# Altium PCB AFE_TESTBRD.PcbDoc
Units mil, origin at the board's own origin, x right, y up, seen from the top; angles counter-clockwise.
Board outline 3937.01 x 1968.5 mil, 2 copper layers (Top Layer, Bottom Layer); 60 components, 25 nets, 146 pads, 22 vias.
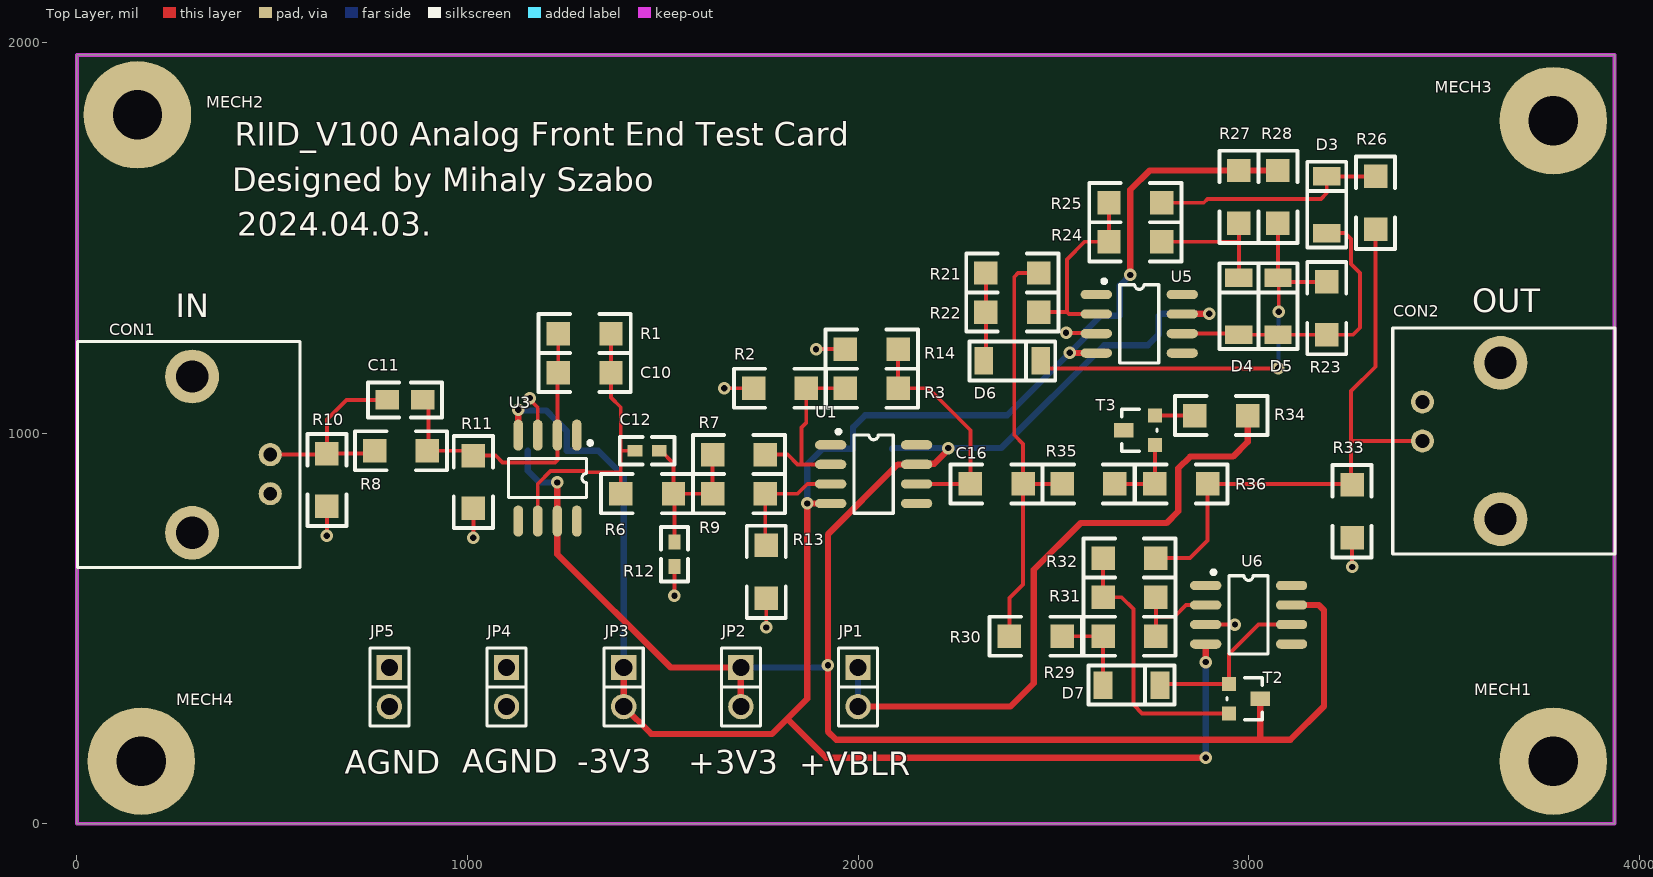
[diagram p0: Top Layer view]
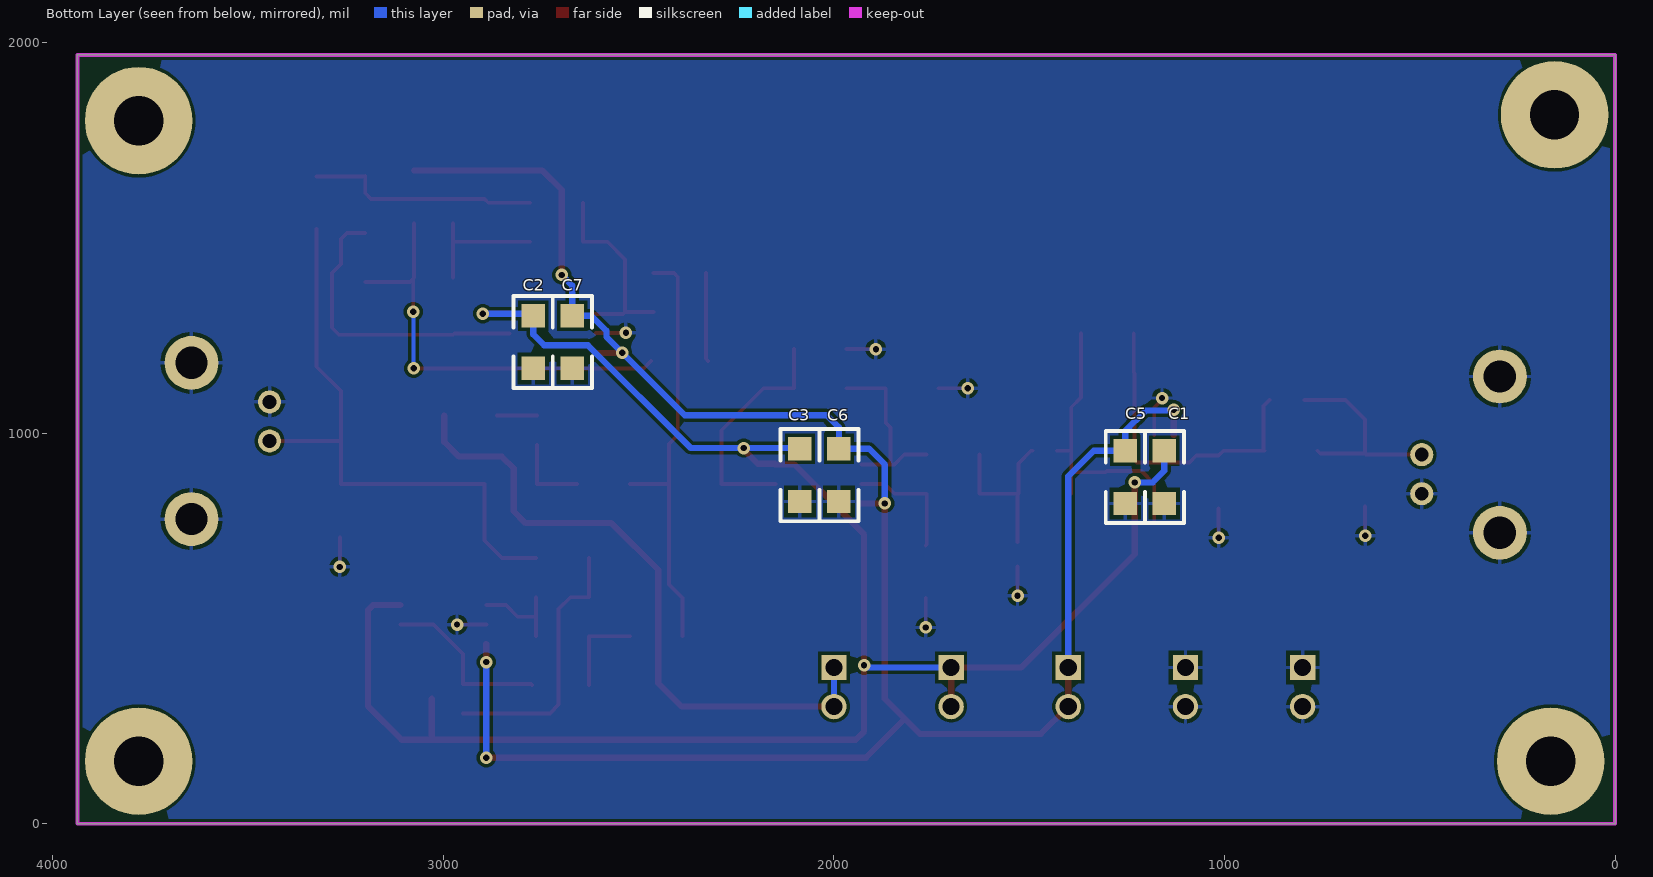
[diagram p1: Bottom Layer view, seen from below]
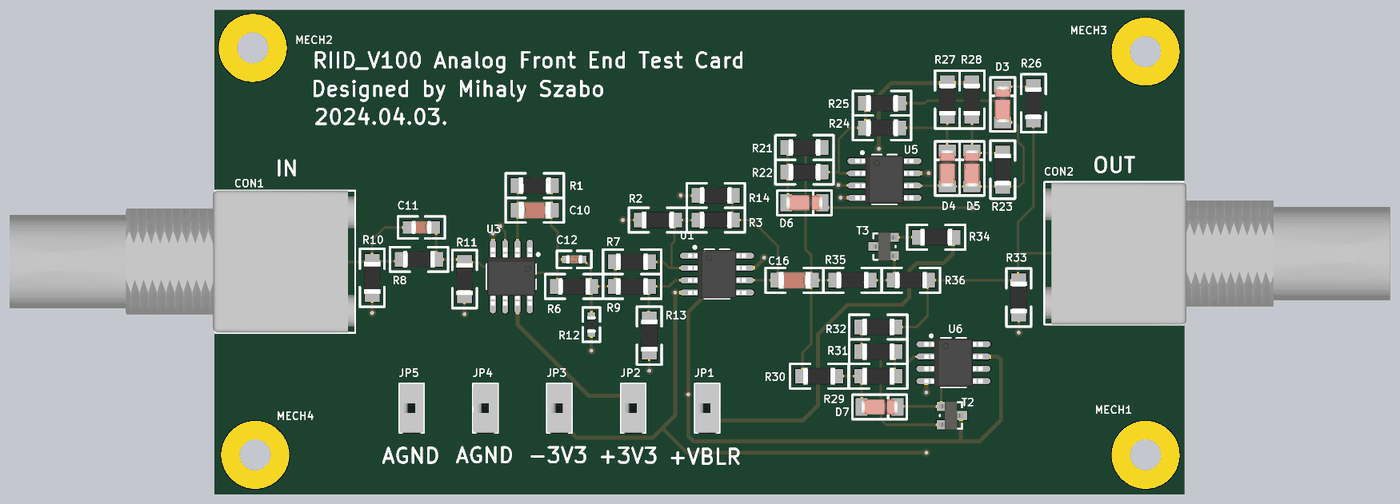
[diagram p2: 3D render of the assembled board from above, using the file's embedded part models]
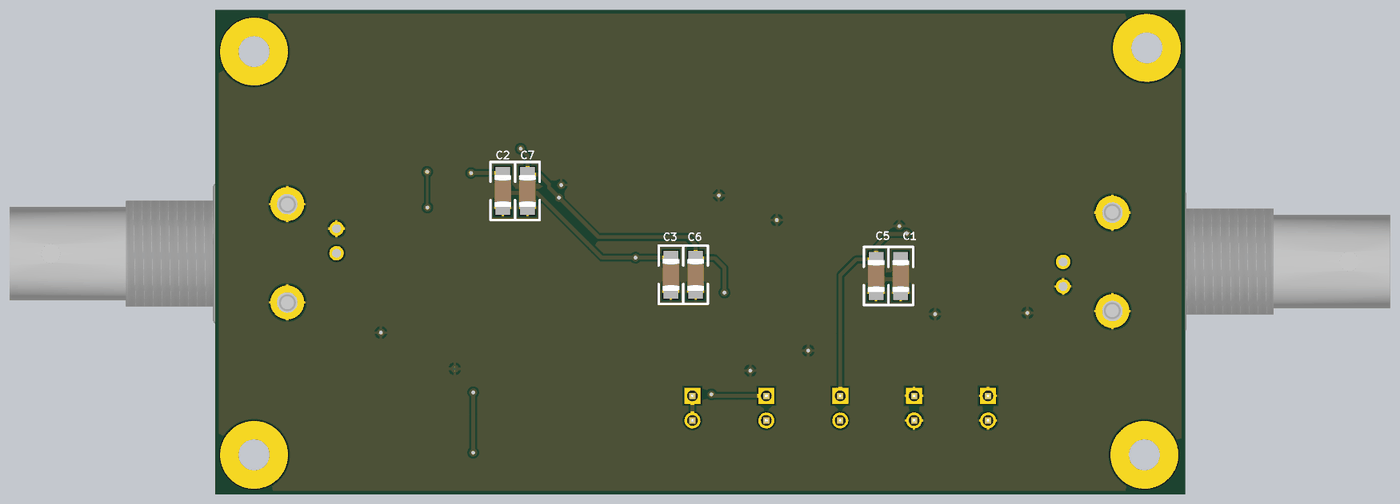
[diagram p3: 3D render of the assembled board from below, using the file's embedded part models]

## Layer stack, top to bottom
Top Solder: solder mask 0.4, Solder Resist, Dk 3.5
Top Layer: signal copper 1.4
Dielectric 1: dielectric 12.6, FR-4, Dk 4.8
Bottom Layer: signal copper 1.4
Bottom Solder: solder mask 0.4, Solder Resist, Dk 3.5

## Board outline
0,0 3937.01,0 3937.01,1968.5 0,1968.5

## Design rules (kind name [scope] priority, off if disabled: settings)
Clearance [All] p1: gap=8 ignorepadtopadclearanceinfootprint=FALSE
PolygonConnect [All] p1: connectstyle=Relief reliefconductorwidth=10 reliefentries=4 polygonreliefangle="90 Angle" airgapwidth=10
RoutingVias [All] p1: holewidth=16 width=32 viastyle="Through Hole" minholewidth=16 minwidth=32 maxholewidth=16 maxwidth=32
SilkToSilkClearance [All] p1 off: silktosilkclearance=10
SilkToSolderMaskClearance [IsPad] p1 off: minsilkscreentomaskgap=10 clearancetoexposedcopper=TRUE
SolderMaskExpansion [All] p1: expansion=4 istentingtop=FALSE
Width [All] p1: maxlimit=40 minlimit=10 preferedwidth=16 minimp=50.000000 maximp=50.000000 favimp=50.000000
28 further rules are at their usual default settings.

## Classes and differential pairs
component class U_BLR: C16 D3 D4 D5 D6 D7 R21 R22 R23 R24 R25 R26 R27 R28 R29 R30 R31 R32 R33 R34 R35 R36 T2 T3 U5 U6
component class AFE: C1 C2 C3 C5 C6 C7 C10 C11 C12 CON1 CON2 JP1 JP2 JP3 JP4 JP5 MECH1 MECH2 MECH3 MECH4 R1 R2 R3 R6 R7 R8 R9 R10 R11 R12 R13 R14 U1 U3

## Components (designator, comment, footprint, x,y, rotation, side; value= is the part's Value field where it differs from the comment)
C1 "100nF / 50V" 1206_C 1159.13,892.5 r270 bottom
C2 "100nF / 50V" 1206_C 2774.95,1238.32 r270 bottom
C3 "100nF / 50V" 1206_C 2092.2,897.5 r270 bottom
C5 "100nF / 50V" 1206_C 1249.13,882.5 r90 bottom
C6 "100nF / 50V" 1206_C 1982.2,887.5 r90 bottom
C7 "100nF / 50V" 1206_C 2664.95,1228.32 r90 bottom
C10 "470pF / 50V" 1206_C 1305,1160 r180 top
C11 "1nF / 50V" 0805_C 840,1085 r0 top
C12 "1nF / 50V" 0603_C 1460,955 r0 top
C16 "1uF / 50V" 1206_C 2350,865 r0 top
CON1 "BNC 90DEG" CON_BNC_TE_ZDC 495,945 r90 top
CON2 "BNC 90DEG" CON_BNC_TE_ZDC 3445,980 r270 top
D3 "BAS85" SOD80 3200,1590 r270 top
D4 "BAS85" SOD80 2975,1330 r270 top
D5 "BAS85" SOD80 3075,1330 r270 top
D6 "BAS85" SOD80 2400,1185 r180 top
D7 "BAS85" SOD80 2705,355 r180 top
JP1 "JUMPER2 2.54MM" JUMPER_5 2000,350 r270 top
JP2 "JUMPER2 2.54MM" JUMPER_5 1700,350 r270 top
JP3 "JUMPER2 2.54MM" JUMPER_5 1400,350 r270 top
JP4 "JUMPER2 2.54MM" JUMPER_5 1100,350 r270 top
JP5 "JUMPER2 2.54MM" JUMPER_5 800,350 r270 top
MECH1 "MH M3" "PAD_M3 x 7" 3780,160 r0 top
MECH2 "MH M3" "PAD_M3 x 7" 155,1815 r0 top
MECH3 "MH M3" "PAD_M3 x 7" 3780,1800 r0 top
MECH4 "MH M3" "PAD_M3 x 7" 165,160 r0 top
R1 "2.2k" 1206 1300,1255 r180 top
R2 "1k" 1206 1800,1115 r0 top
R3 "4.7k" 1206 2035,1115 r0 top
R6 "1k" 1206 1460,845 r0 top
R7 "0R" 1206 1695,945 r0 top
R8 "0R" 1206 830,955 r0 top
R9 "0R" 1206 1695,845 r0 top
R10 "0R" 1206 640,880 r90 top
R11 "0R" 1206 1015,875 r90 top
R12 "220R" 0603 1530,690 r90 top
R13 "0R" 1206 1765,645 r90 top
R14 "1k" 1206 2035,1215 r0 top
R21 "0R" 1206 2395,1410 r180 top
R22 "1k" 1206 2395,1310 r0 top
R23 "1k" 1206 3200,1320 r270 top
R24 "10k" 1206 2710,1490 r0 top
R25 "1k" 1206 2710,1590 r0 top
R26 "0R" 1206 3325,1590 r270 top
R27 "1k" 1206 2975,1605 r270 top
R28 "1k" 1206 3075,1605 r270 top
R29 "1k" 1206 2695,480 r0 top
R30 "0R" 1206 2455,480 r0 top
R31 "1k" 1206 2695,580 r180 top
R32 "0R" 1206 2695,680 r0 top
R33 "1k" 1206 3265,800 r90 top
R34 "1k" 1206 2930,1045 r180 top
R35 "0R" 1206 2590,870 r0 top
R36 "0R" 1206 2827.5,870 r0 top
T2 "BC848B" SOT-23 2990,320 r270 top
T3 "BC856B" SOT-23 2720,1007.4 r90 top
U1 "LT1806CS8#PBF" SO-8 2040,895 r0 top
U3 "OPA656" SO-8 1205,885 r270 top
U5 "LT1806CS8#PBF" SO-8 2720,1280 r0 top
U6 "LT1806CS8#PBF" SO-8 3000,535 r0 top

## Footprints (in the part's own frame and the unit in brackets; to place one, negate y for a bottom-side part, rotate by r counter-clockwise, add the part's x,y. Pads: shape width x height; smd on the part's side, far side on the other; paste and mask are expansions set on the pad)
0603 [mil]
  rect 38x30 smd: 1(-31,0) 2(31,0)
  silkscreen extent -70,-35 70,35, body extent -33,-18 33,18, height 22
0603_C [mil]
  rect 38x30 smd: 1(-31,0) 2(31,0)
  silkscreen extent -70,-35 70,35, body extent -33,-18 33,18, height 35
0805_C [mil]
  rect 60x50 smd: 1(-45,0) 2(45,0)
  silkscreen extent -95,-45 95,45, body extent -41,-27 41,27, height 30
1206 [mil]
  rect 60x60 smd: 1(-67.5,0) 2(67.5,0)
  silkscreen extent -118,-50 118,50, body extent -65,-33 65,33, height 26
1206_C [mil]
  rect 60x60 smd: 1(-62.5,5) 2(72.5,5)
  silkscreen extent -113,-45 123,55, body extent -61,-29 71,39, height 39
CON_BNC_TE_ZDC [mm]
  round 1.5 hole 0.9: 1(0,0) 2(-2.54,0)
  round 3.5 hole 2.1: 3(5.08,5.08) 4(-5.08,5.08)
  silkscreen extent -7.35,-1.93 7.35,12.53, body extent -7.32,-1.85 7.38,33.72, height 15.2
JUMPER_5 [mil]
  rect 65x65 hole 44: 1(-50,0)
  round 65 hole 44: 2(50,0)
  silkscreen extent -100,-50 100,50, body extent -99,-49 104,49, height 488
"PAD_M3 x 7" [mm]
  round 7 hole 3.2: M3(0,0)
SO-8 [mil]
  oval 80x24 smd: 1(-110,75) 2(-110,25) 3(-110,-25) 4(-110,-75) 5(110,-75) 6(110,-25) 7(110,25) 8(110,75)
  silkscreen extent -95,-100 50,114, body extent -118,-98 118,98, height 69
SOD80 [mil]
  rect 48x70 smd: A(78,0) K(-68,0)
  silkscreen extent -105,-50 115,50, body extent -68,-32 78,32, height 63
SOT-23 [mil]
  rect 36x36 smd: 1(-37.4,-40) 2(37.4,-40)
  rect 36x50 smd: 3(0,40)
  silkscreen extent -54,-45 54,45, body extent -57,-49 57,48, height 40

## Part data
C1 C2 C3 C5 C6 C7: library part 163, "100nF 50V X7R", Part Number=SMD1206-100nF-50V, Azonosító=163, Category=Passives, Subcategory=PASS_Capacitor, Supplier 1=HESTORE, Supplier 1 order number=100.002.89
C10: library part 159, "470pF 50V C0G", Part Number=SMD1206-470pF-50V, Azonosító=159, Category=Passives, Subcategory=PASS_Capacitor, Supplier 1=HESTORE, Supplier 1 order number=100.201.00
C11: library part 144, "1nF 50V X7R", Part Number=SMD0805-1nF-50V, Azonosító=144, Category=Passives, Subcategory=PASS_Capacitor, Supplier 1=HESTORE, Supplier 1 order number=100.200.70
C12: library part 121, "1 nF 50V X7R", Part Number=SMD0603-1nF-50V, Azonosító=121, Category=Passives, Subcategory=PASS_Capacitor, Supplier 1=HESTORE, Supplier 1 order number=100.277.92
C16: library part 166, "1uF 50V X7R", Part Number=SMD1206-1uF-50V, Azonosító=166, Category=Passives, Subcategory=PASS_Capacitor, Supplier 1=HESTORE, Supplier 1 order number=100.275.08
CON1 CON2: library part 322, "031-5431", Azonosító=322, Category=Connectors, Help URL=https://hu.mouser.com/datasheet/2/18/1/C031_5431-2452407.pdf, Part Number="BNC 90DEG", Subcategory=CONN_Board-to-Wire, Supplier 1=MOUSER, Supplier 1 order number=523-31-5431
D3 D4 D5 D6 D7: library part 371, "Small Signal Schottky Diode, Single, 30 V, 200 mA,  125 °C", Azonosító=371, Category=Semiconductors, Help URL=https://4donline.ihs.com/images/VipMasterIC/IC/NEXP/NEXP-S-A0002881467/NEXP-S-A0002882622-1.pdf?hkey=6D3A4C79FDBF58556ACFDE234799DDF0, Part Number=BAS85, Subcategory=SEMI_Schottky, Supplier 1=HESTORE, Supplier 1 order number=100.222.42, Supplier 2=FARNELL, Supplier 2 order number=1097282
JP1 JP2 JP3 JP4 JP5: library part 246, Azonosító=246, Category=Connectors, Part Number="JUMPER2 2.54MM", Subcategory=CONN_Other, Supplier 1=FARNELL, Supplier 1 order number=2356153
MECH1 MECH2 MECH3 MECH4: library part 268, "3.2/7mm Mounting_Hole_M3", Part Number=Mounting_Hole_M3, Azonosító=268, Category=Electro-mechanicals, Subcategory=ELME_Other
R1: library part 88, "2.2k 1206 0.25W 5%", Part Number="SMD1206-2.2k 5%", Azonosító=88, Category=Passives, Subcategory=PASS_Resistor, Supplier 1=HESTORE, Supplier 1 order number=100.002.94
R2 R6 R14 R22 R23 R25 R27 R28 R29 R31 R33 R34: library part 87, "1k 1206 0.25W 5%", Part Number="SMD1206-1k 5%", Azonosító=87, Category=Passives, Subcategory=PASS_Resistor, Supplier 1=HESTORE, Supplier 1 order number=100.002.56
R3: library part 90, "4.7k 1206 0.25W 5%", Part Number="SMD1206-4.7k 5%", Azonosító=90, Category=Passives, Subcategory=PASS_Resistor, Supplier 1=HESTORE, Supplier 1 order number=100.002.99
R7 R8 R9 R10 R11 R13 R21 R26 R30 R32 R35 R36: library part 74, "0R 1206 0.25W 5%", Part Number="SMD1206-0R 5%", Azonosító=74, Category=Passives, Subcategory=PASS_Resistor, Supplier 1=HESTORE, Supplier 1 order number=100.013.21
R12: library part 14, "220R 0603 0.1W 1%", Part Number=SMD0603-220R-1%, Azonosító=14, Category=Passives, Subcategory=PASS_Resistor, Supplier 1=HESTORE, Supplier 1 order number=100.368.36
R24: library part 92, "10k 1206 0.25W 5%", Part Number="SMD1206-10k 5%", Azonosító=92, Category=Passives, Subcategory=PASS_Resistor, Supplier 1=HESTORE, Supplier 1 order number=100.002.97
T2: library part 309, "Bipolar (BJT) Single Transistor, NPN, 30 V, 100 mA, 300 mW, SOT-23, Surface Mount", Azonosító=309, Category=Semiconductors, Help URL=https://hu.mouser.com/datasheet/2/849/bc846-3324195.pdf, Part Number=BC848B, Subcategory=SEMI_Transistor, Supplier 1=HESTORE, Supplier 1 order number=100.209.08, Supplier 2=MOUSER, Supplier 2 order number=637-BC848B
T3: library part 312, "BC856B Bipolar (BJT) Single Transistor, PNP, 65 V, 100 mA, 250 mW, SOT-23, Surface Mount", Azonosító=312, Category=Semiconductors, Help URL=https://hu.mouser.com/datasheet/2/849/bc856-3324318.pdf, Part Number=BC856B, Subcategory=SEMI_Transistor, Supplier 1=HESTORE, Supplier 1 order number=100.001.06, Supplier 2=MOUSER, Supplier 2 order number=637-BC856B
U1 U5 U6: library part 353, "Single Channel, High Speed, Low Noise Precision Operational Amplifier, 325 MHz Typical GBW, 125 V/us Typical SR, 2.5 to 12.6 V, 8-Pin SOIC", Linear Technology Part Number=LT1806, Manufacturer="Linear Technology", Azonosító=353, Category="Integrated Circuits", Channels (#)=1, ComponentLink1Description="Manufacturer URL", ComponentLink1URL=http://www.linear.com/, ComponentLink2Description=Datasheet, ComponentLink2URL=http://cds.linear.com/docs/en/datasheet/18067fc.pdf, ComponentLink3Description="Package Specification", ComponentLink3URL=http://cds.linear.com/docs/en/packaging/05081610_G_SO8.pdf, DatasheetVersion="Rev. C", GBW (MHz) Typical=325, Help URL=https://hu.mouser.com/datasheet/2/609/18067fc-3124195.pdf, Is (mA) Typical=9, Mounting Technology="Surface Mount", PackageDescription="8-Pin Plastic Small Outline, Body 4.9 x 3.9 mm, Pitch 1.27 mm", PackageReference=LT-S8-8, PackageVersion="Rev G", Part Number=LT1806CS8#PBF, PartNumber=LT1806CS8#PBF, RevisionNote="URLs updated", RoHS=Pb-Free, SR (V/us) Typical=125, Subcategory=IC_Analog, Supplier 1=MOUSER, Supplier 1 order number=584-LT1806CS8#PBF, Type=VFB, Vos (mV) Guaranteed=0.55, Vos (mV) Typical=0.1, Vs Max (V)=12.6, Vs Min (V)=2.5
U3: library part 357, "Wideband, Unity Gain Stable FET-Input Operational Amplifier, 10 to 12 V, -40 to 85 degC, 8-pin SOIC", Manufacturer="Texas Instruments", PartNumber=OPA656U, 2nd Harmonic(dBc)=74, 3rd Harmonic(dBc)=100, @ MHz=5, Acl, min stable gain(V/V)=1, Azonosító=357, BW @ Acl(MHz)=500, Category="Integrated Circuits", Code_JEDEC=MS-012, ComponentLink1Description="Manufacturer URL", ComponentLink1URL=http://www.ti.com/, ComponentLink2Description=Datasheet, ComponentLink2URL=http://www.ti.com/general/docs/lit/getliterature.tsp?genericPartNumber=OPA656&fileType=pdf, ComponentLink3Description="Package Specification", ComponentLink3URL=http://www.ti.com/litv/pdf/msoi002j, DatasheetVersion=SBOS196G, Diff Gain(%)=0.02, Diff Phase(deg)=0.05, Eco-Plan="Green (RoHS & no Sb/Br)", Help URL=https://www.ti.com/lit/ds/symlink/opa656.pdf?HQS=dis-mous-null-mousermode-dsf-pf-null-wwe&ts=1703783263659&ref_url=https%253A%252F%252Fhu.mouser.com%252F, Iib(Max)(nA)=0.02, Io(Typ)(mA)=70, Iq per channel(Max)(mA)=16, Mounting Technology="Surface Mount", Number of Channels=1, PackageDescription="8-Pin Plastic Small Outline, Body 4.9 x 3.9 mm, Pitch 1.27 mm", PackageReference=D0008A, PackageVersion="4040047-3/M, 06/2011", Part Number=OPA656, Settling Time (0.1%)(Typ)(ns)=16, Slew Rate(Typ)(V/us)=290, Sub Family="High Output Current Amplifier (>=50mA), High Speed Amplifier (>=50MHz), Low Input Bias Current Amp (<=10pA)", Subcategory=IC_Analog, Supplier 1=MOUSER, Supplier 1 order number=595-OPA656U, Supplier 2=DIGIKEY, Supplier 2 order number=OPA656U-ND, THD (Fc is 1 MHz)(Typ)(dB)=-74, Vio(Max)(mV)=0.6, Vn at Flatband(Typ)(nV/rtHz)=7, Vs(Max)(V)=12, Vs(Min)(V)=10

## Via types
v1: diameter 32, hole 16, Top Layer to Bottom Layer, tented both sides, 22 vias

## Nets (pads, with @x,y where several pads share a name; then routed paths per layer and width w, separated by ;. In a path a pad name is that pad's centre, name@x,y a point inside that pad or via, vN(x,y) a via of type N, cw(c..) or ccw(c..) an arc to the next point about the centre after c; other vN are vias at no path point)
+3.3V_ANA: C1.1 C2.1 C3.1 JP2.1 JP2.2 T2.3 U1.7 U3.7 U5.7 U6.7 | length 4952.7
  Top Layer w16: v1(1230,874) U3.7 1230,690 1520,400 JP2.1 JP2.2 ; v1(2231,962) 2231,957.67 2194.86,921.53 2151.53,921.53 U1.7 2102.2,920 1923,740.8 v1(1923,406) 1923,236 1944,215 3029.14,215 ; U5.7 2830.5,1305.5 2898.5,1305.5 v1(2899,1306) ; T2.3 3030,215.86 3029.14,215 ; U6.7 3180,560 3193,547 3193,301 3107,215 3029.14,215
  Bottom Layer w16: C1.1 1154.13,903.87 1184,874 v1(1230,874) ; JP2.1 1912.67,400 1918.67,406 v1(1923,406) ; C3.1 2089.2,962 v1(2231,962) 2367,962 2630,1225 2742.27,1225 2770,1252.73 2770,1300.87 2775.13,1306 v1(2899,1306)
+VBLR: JP1.1 JP1.2 R34.1 | length 1679.9
  Top Layer w16: JP1.2 2390,300 2450,360 2450,650 2570,770 2790,770 2820,800 2820,910 2850,940 2960,940 2997.5,977.5 R34.1
  Bottom Layer w16: JP1.2 JP1.1
-3.3V_ANA: C5.2 C6.2 C7.2 JP3.1 JP3.2 R27.1 R28.1 U1.4 U3.4 U5.4 U6.4 | length 5424.3
  Top Layer w16: U3.4 v1(1130,1060) ; JP3.1 JP3.2 1470,230 1780,230 1818.58,268.58 ; U1.4 v1(1870,820) 1870,320 1818.58,268.58 ; v1(2542,1206) 2542.5,1205.5 2609.5,1205.5 U5.4 ; v1(2697,1405) 2697,1623 2746.5,1672.5 R27.1 R28.1 ; v1(2890,169) 1918.16,169 1818.58,268.58 ; v1(2890,414) U6.4
  Bottom Layer w10: 1224.83,1034.8 1226.88,1032.75
  Bottom Layer w16: v1(1130,1060) 1132,1058 1201.63,1058 1224.83,1034.8 ; 1226.88,1032.75 1254.13,1005.5 C5.2 1335,955 1400,890 JP3.1 ; v1(1870,820) 1870,920 1910,960 C6.2 1987.2,1015.2 2018,1046 2382,1046 v1(2542,1206) 2582.5,1246.5 2582.5,1261.9 2621.42,1300.82 C7.2 2669.95,1377.95 v1(2697,1405) ; v1(2890,169) v1(2890,414)
AGND: C1.2 C2.2 C3.2 C5.1 C6.1 C7.1 CON1.2 CON1.3 CON1.4 CON2.2 CON2.3 CON2.4 JP4.1 JP4.2 JP5.1 JP5.2 R2.1 R10.1 R11.1 R12.1 R13.1 R14.1 R33.1 U3.3 U5.3 U6.3 | length 781.6
  Top Layer w10: v1(640,737.5) R10.1 ; v1(1015,732.5) R11.1 ; v1(1160,1090) 1160,1086.16 1180,1066.16 U3.3 ; v1(1530,584) R12.1 ; v1(1657.5,1115) R2.1 ; v1(1765,502.5) R13.1 ; v1(1892.5,1215) R14.1 ; v1(2532.67,1257.33) 2533.84,1256.16 2608.84,1256.16 U5.3 ; U6.3 v1(2965,510) ; v1(3265,657.5) R33.1
NetC10_1: C10.1 C12.1 R1.1 R6.1 U3.6 | length 779.3
  Top Layer w10: U3.6 1180,870 1213,903 1301.25,903 1304.25,900 1392.5,900 ; R1.1 C10.1 1367.5,1091.34 1392.5,1066.34 1392.5,955 ; R6.1 1392.5,900 ; C12.1 1392.5,955 ; 1392.5,900 1392.5,955
NetC10_2: C10.2 C11.2 R1.2 R8.2 R11.2 U3.2 | length 809.8
  Top Layer w10: C11.2 900,1070 900,957.5 R8.2 1002.5,955 R11.2 1072.5,942.5 1090,925 1224.13,925 1230,930.87 U3.2 1230,1152.5 C10.2 R1.2
NetC11_1: C11.1 CON1.1 R8.1 R10.2 | length 534.9
  Top Layer w10: CON1.1 637.5,945 R10.2 ; R8.1 755,947.5 R10.2 ; C11.1 690,1085 640,1035 R10.2
NetC12_2: C12.2 R6.2 R7.1 R9.1 R12.2 | length 452.5
  Top Layer w10: C12.2 1495,955 1527.5,922.5 R6.2 ; R12.2 1530,842.5 R6.2 ; R7.1 R9.1 R6.2
NetC16_1: C16.1 R3.2 R14.2 U1.6 | length 604.5
  Top Layer w10: R14.2 R3.2 2180,1115 2287.5,1007.5 C16.1 U1.6
NetC16_2: C16.2 R21.1 R30.1 R35.1 | length 1110.5
  Top Layer w10: R30.1 2387.5,577.5 2422.5,612.5 C16.2 ; R21.1 2410,1410 2400,1400 2400,995 2422.5,972.5 C16.2 ; R35.1 C16.2
NetCON2_1: CON2.1 R26.2 R32.2 R33.2 R36.2 | length 1524.5
  Top Layer w10: R32.2 2850,680 2895,725 R36.2 3262.5,870 3262.5,980 ; R26.2 3325,1170 3262.5,1107.5 3262.5,980 ; CON2.1 3262.5,980
NetD3_A: D3.A D4.A D5.A R23.2 U5.6 | length 768.4
  Top Layer w10: U5.6 2972,1255 D4.A D5.A 3267,1252 3285,1270 3285,1410 3262,1433 3262,1497 3247,1512 D3.A
NetD3_K: D3.K R25.2 R26.1 | length 601.1
  Top Layer w10: R25.2 2885,1590 2895,1600 3185,1600 3200,1615 D3.K 3200.5,1657.5 R26.1
NetD4_K: D4.K R24.2 R27.2 | length 337
  Top Layer w10: R24.2 2975,1490 ; D4.K 2975,1490 ; R27.2 2975,1490
NetD5_K: D5.K D6.K R23.1 R28.2 | length 1115.4
  Top Layer w10: D6.K 2468,1184.82 2487,1165.82 3075.82,1165.82 v1(3076,1166) ; R28.2 D5.K D5.K@3077,1396 ; v1(3077,1311) D5.K@3077,1396 ; R23.1 3085.5,1387.5 D5.K@3077,1396
  Bottom Layer w10: v1(3076,1166) 3076.5,1166.5 3076.5,1310.5 v1(3077,1311)
NetD6_A: D6.A R21.2 R22.1 | length 227.3
  Top Layer w10: D6.A 2327.5,1190.5 R21.2
NetD7_A: D7.A R29.1 R30.2 | length 230.2
  Top Layer w10: R30.2 R29.1 2627.5,355.5 D7.A
NetD7_K: D7.K T2.1 U6.6 | length 446.7
  Top Layer w10: D7.K 2775.4,357.4 T2.1 2950,435 3025,510 U6.6
NetR2_2: R2.2 R3.1 R7.2 U1.2 | length 478
  Top Layer w10: R7.2 1820,945 1845,920 1855,920 ; U1.2 1855,920 ; R3.1 R2.2 1867.5,1027.5 1855,1015 1855,920
NetR9_2: R9.2 R13.2 U1.3 | length 311.4
  Top Layer w10: R13.2 1762.5,715 R9.2 1845,845 1870,870 U1.3
NetR22_2: R22.2 R24.1 R25.1 U5.2 | length 510.7
  Top Layer w10: R22.2 2535,1310 ; U5.2 2540,1305 2535,1310 ; R25.1 R24.1 2580,1490 2535,1445 2535,1310
NetR29_2: R29.2 R31.1 U6.2 | length 239.9
  Top Layer w10: R29.2 2762.5,530 ; R31.1 2762.5,530 ; U6.2 2840,560 2810,530 2762.5,530
NetR31_2: R31.2 R32.1 T2.2 | length 689.2
  Top Layer w10: R32.1 R31.2 2675,580 2705,550 2705,305 2727.4,282.6 T2.2
NetR34_2: R34.2 T3.2 | length 102.6
  Top Layer w10: T3.2 2862.3,1044.8 R34.2
NetR35_2: R35.2 R36.1 T3.1 | length 202.5
  Top Layer w10: R35.2 R36.1 T3.1
pads on no net: MECH1.M3 MECH2.M3 MECH3.M3 MECH4.M3 T3.3 U1.1 U1.5 U1.8 U3.1 U3.5 U3.8 U5.1 U5.5 U5.8 U6.1 U6.5 U6.8

## Polygon pours and split planes (outlines as drawn)
AGND on Bottom Layer "NONET_L-01_P-001" (solid, remove dead copper, pour order 0): 0,1968.5 0,0 3937.01,0 3937.01,1968.5

## Keep-outs
Keep-Out Layer:
  the board outline again, w10

## Silkscreen, mask and mechanical layers (free items; w line width, h text height)
Top Overlay:
  text "RIID_V100 Analog Front End Test Card" at 404.34,1735.99 h60
  text "Designed by Mihaly Szabo" at 398.22,1619.99 h60
  text "2024.04.03." at 411.1,1506 h60
  text "OUT" at 3572.57,1309.74 h60
  text "IN" at 253.57,1296.33 h60
  text "AGND" at 986.04,130 h60
  text "-3V3" at 1280.65,130.1 h60
  text "AGND" at 686.04,128 h60
  text "+3V3" at 1565.65,128.1 h60
  text "+VBLR" at 1849.66,124.1 h60